# Altium PCB Sensor.PcbDoc
Units mil, origin at the board's own origin, x right, y up, seen from the top; angles counter-clockwise.
Board outline 3145 x 2060 mil, 2 copper layers (Top Layer, Bottom Layer); 73 components, 75 nets, 233 pads, 48 vias.
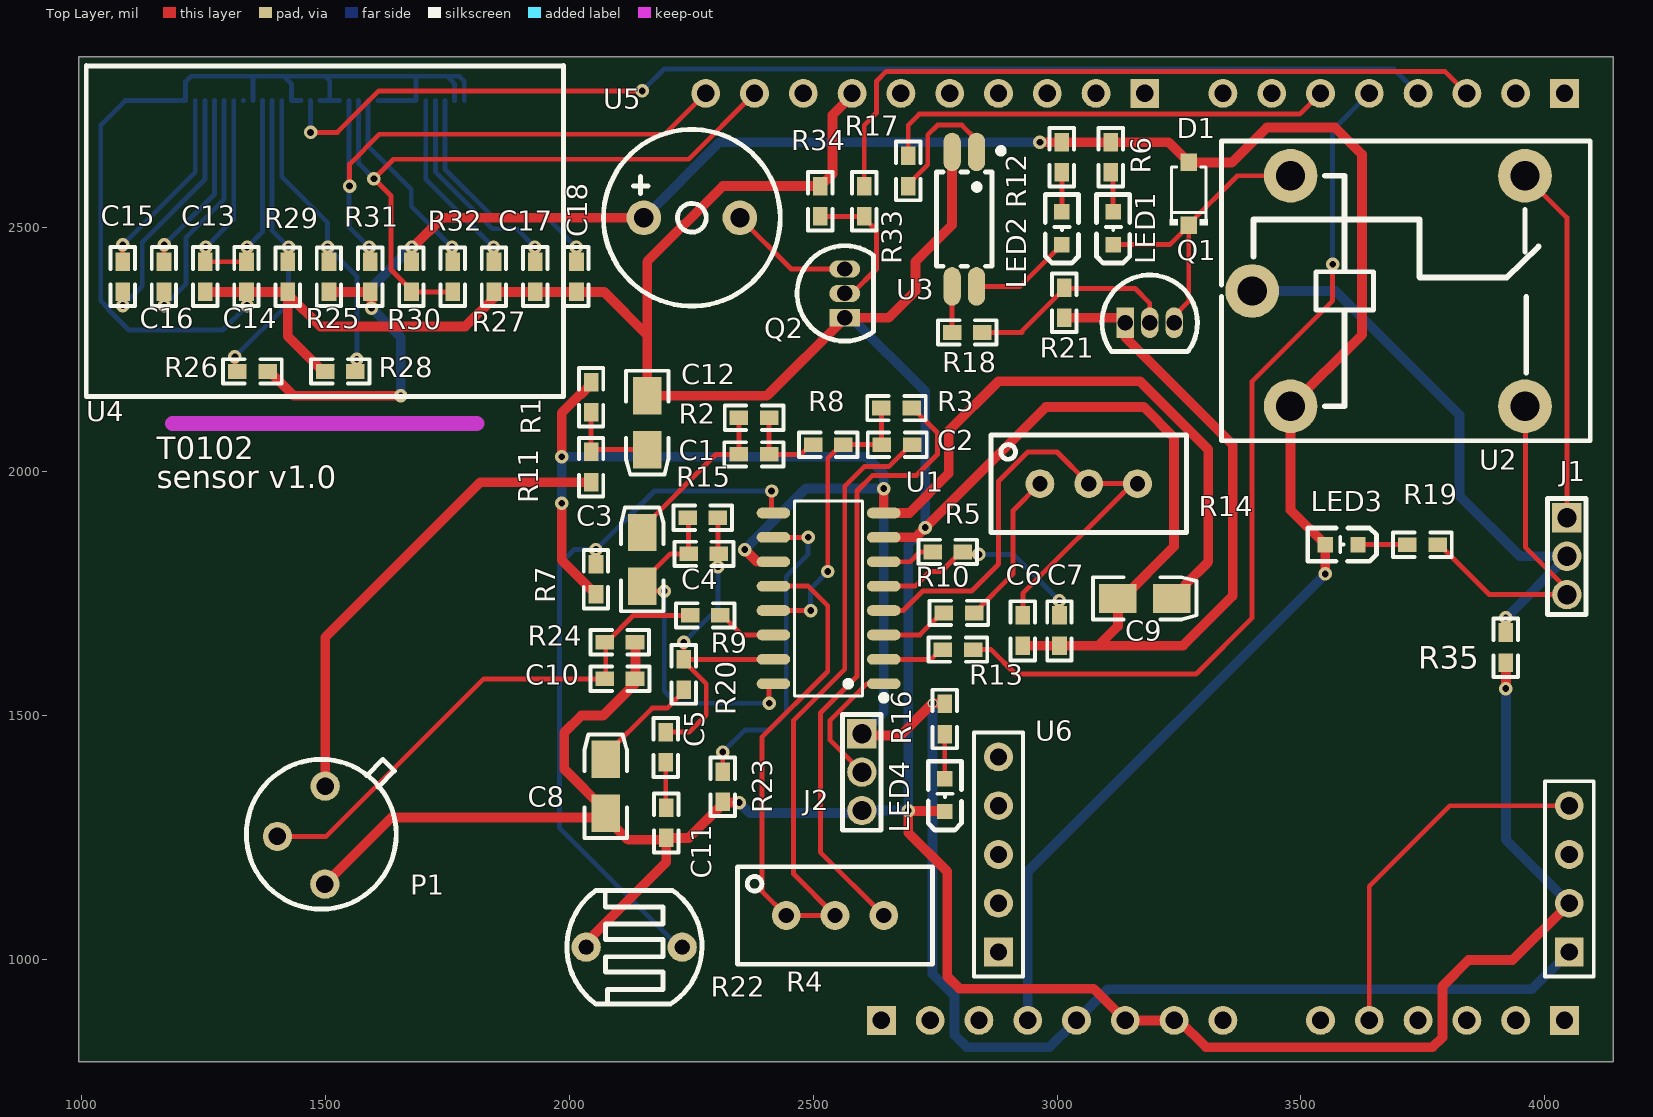
[diagram p0: Top Layer view]
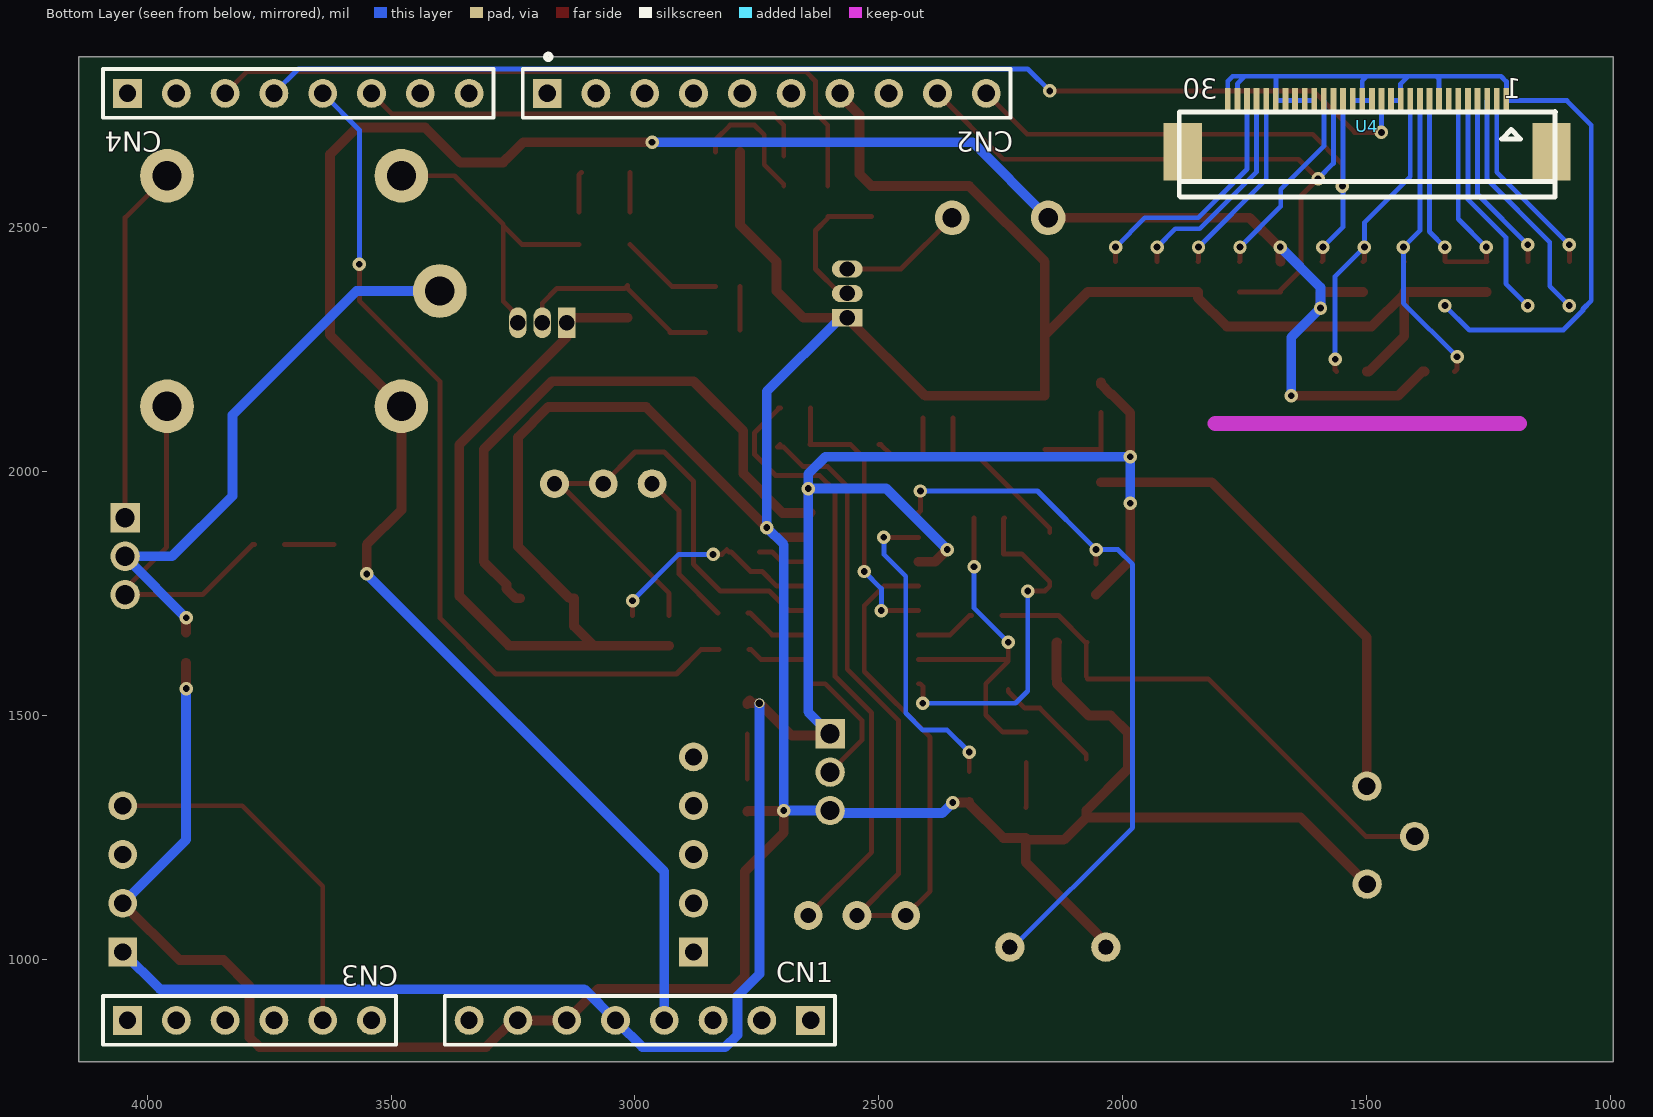
[diagram p1: Bottom Layer view, seen from below]
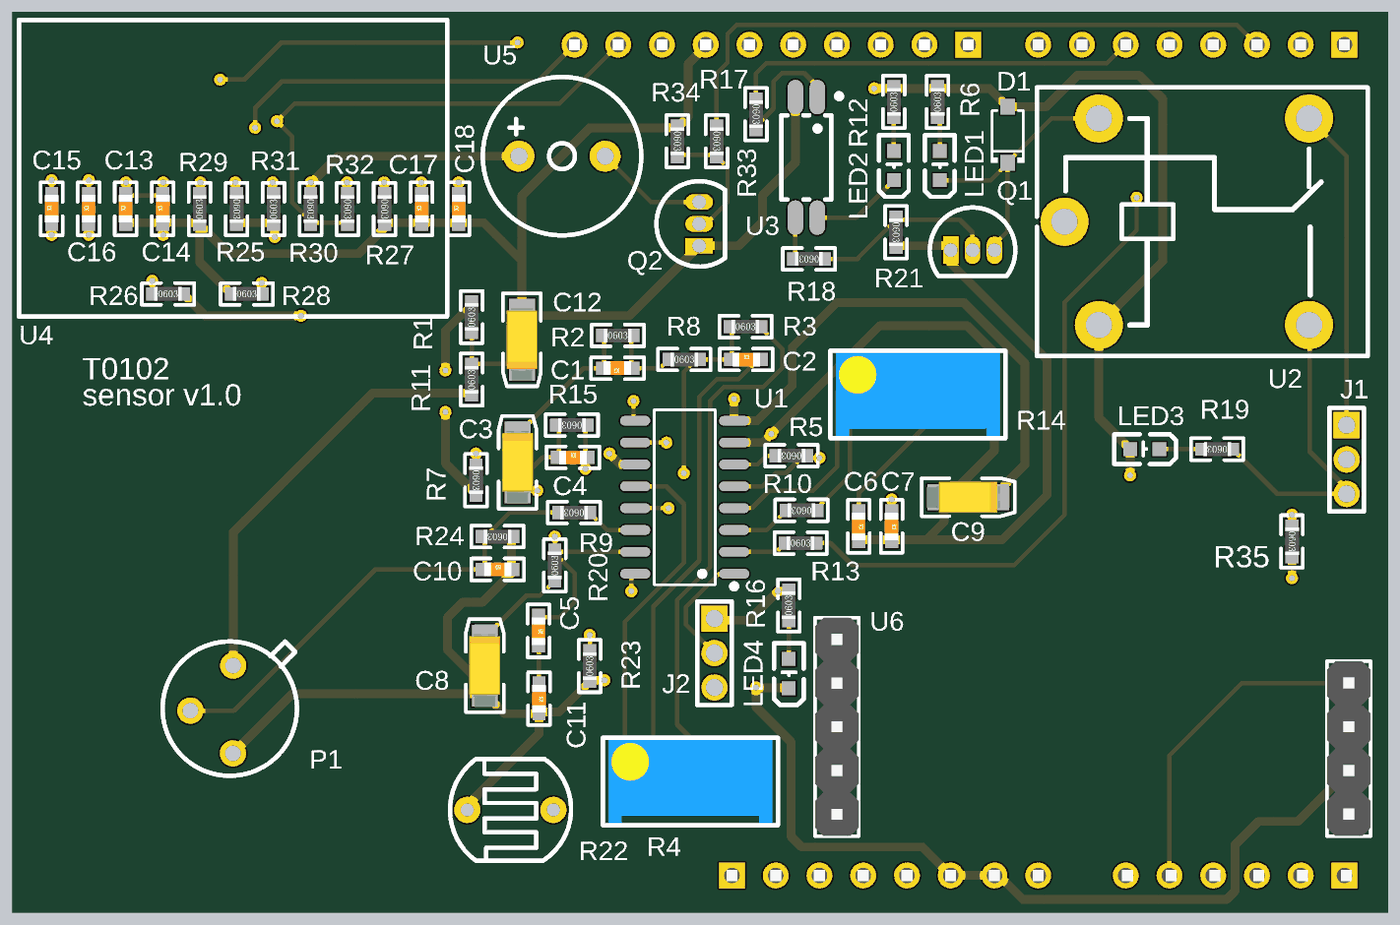
[diagram p2: 3D render of the assembled board from above, using the file's embedded part models]
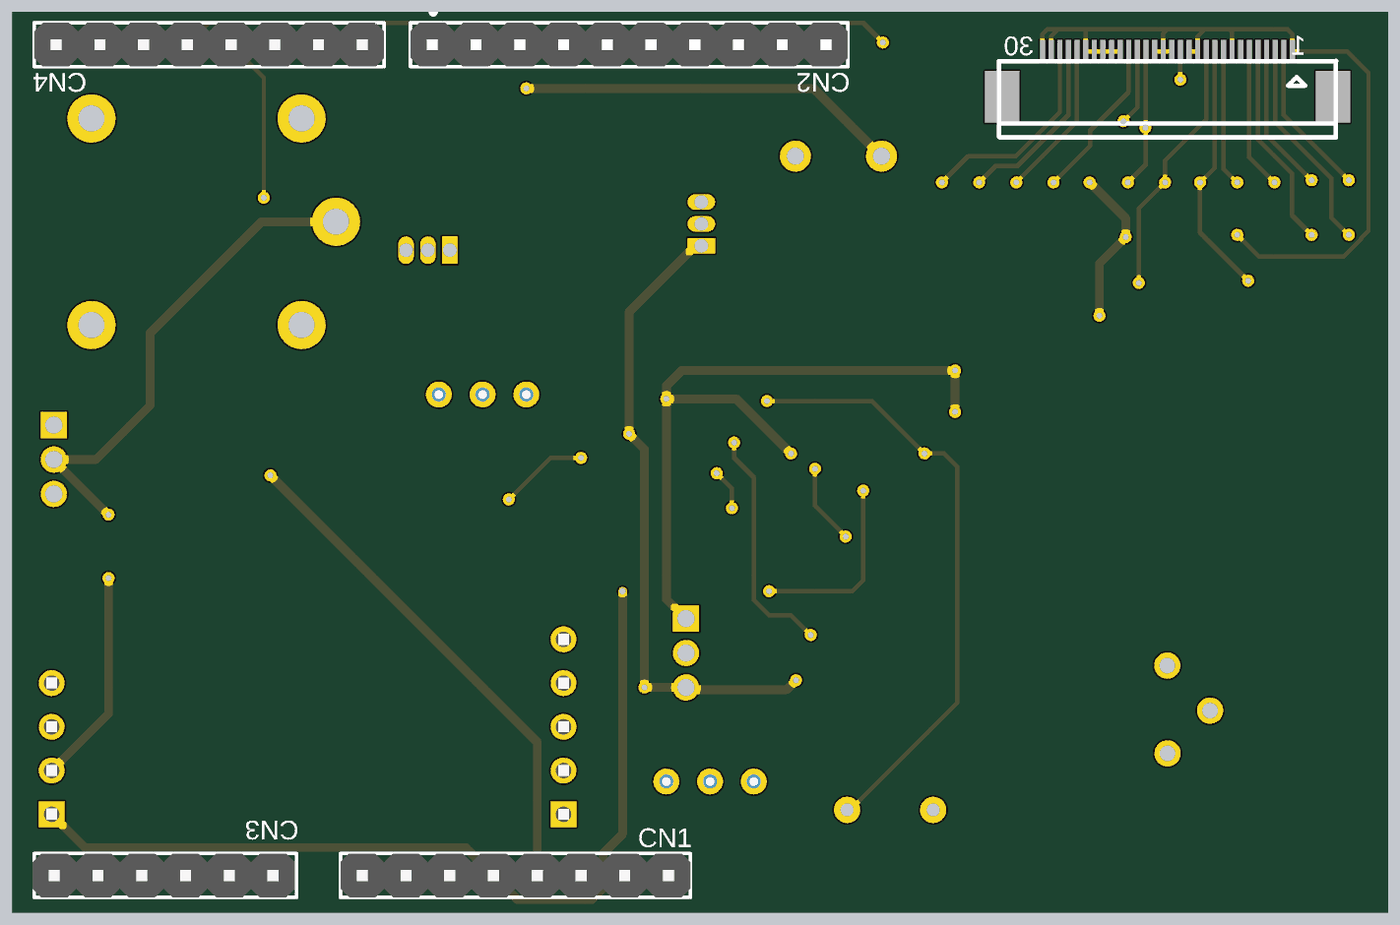
[diagram p3: 3D render of the assembled board from below, using the file's embedded part models]

## Layer stack, top to bottom
Top Solder: solder mask 0.4, Solder Resist, Dk 3.5
Top Layer: signal copper 1.4
Dielectric 1: dielectric 12.6, FR-4, Dk 4.8
Bottom Layer: signal copper 1.4
Bottom Solder: solder mask 0.4, Solder Resist, Dk 3.5

## Board outline
995,995 995,2850 4140,2850 4140,790 995,790

## Design rules (kind name [scope] priority, off if disabled: settings)
Clearance [All] p1: gap=6 ignorepadtopadclearanceinfootprint=FALSE
MinimumSolderMaskSliver [All] p1: minsoldermaskwidth=5
PolygonConnect [All] p1: connectstyle=Relief reliefconductorwidth=10 reliefentries=4 polygonreliefangle="90 Angle" airgapwidth=10
RoutingVias [All] p1: holewidth=28 width=50 viastyle="Through Hole" minholewidth=28 minwidth=50 maxholewidth=28 maxwidth=50
SilkToSilkClearance [All] p1: silktosilkclearance=6
SilkToSolderMaskClearance [IsPad] p1: minsilkscreentomaskgap=0 clearancetoexposedcopper=TRUE
SolderMaskExpansion [All] p1: expansion=4
Width width_Power [InNetClass('All Nets')] p1: maxlimit=30 minlimit=10 preferedwidth=20
Width [All] p2: maxlimit=30 minlimit=8 preferedwidth=10
27 further rules are at their usual default settings.

## Components (designator, comment, footprint, x,y, rotation, side; value= is the part's Value field where it differs from the comment)
C1 "0.1uF" "0603 - CAP" 2410,2035 r180 top value="100nF(104) ±10% 10V"
C2 "0.01uF" "0603 - CAP" 2641,2055 r0 top value="10nF(103) ±10% 10V"
C3 "22uF" C-钽贴A(S)_3216M_18(12) 2150,1819.88 r270 top value="22uF(226) ±20% 6.3V"
C4 "0.01uF" "0603 - CAP" 2245,1831.1 r0 top value="10nF(103) ±10% 10V"
C5 "5.0nF" "0603 - CAP" 2198,1465.9 r270 top value="5.0nF(502) ±10% 50V"
C6 "0.01uF" "0603 - CAP" 2930,1705 r270 top value="10nF(103) ±10% 10V"
C7 "0.1uF" "0603 - CAP" 3005,1705 r270 top value="100nF(104) ±10% 10V"
C8 "47uF" C-钽贴A(S)_3216M_18(12) 2075,1355 r270 top value="47uF(476) ±10% 6.3V"
C9 "22uF" C-钽贴A(S)_3216M_18(12) 3180,1740 r180 top value="22uF(226) ±20% 6.3V"
C10 "0.01uF" "0603 - CAP" 2073,1575 r0 top value="10nF(103) ±10% 10V"
C11 "0.01uF" "0603 - CAP" 2199,1311 r270 top value="10nF(103) ±10% 10V"
C12 "47uF" C-钽贴A(S)_3216M_18(12) 2160,2100.12 r90 top value="47uF(476) ±10% 6.3V"
C13 "1uF" "0603 - CAP" 1254.09,2368 r90 top value="1uF(105) ±10% 6.3V"
C14 "1uF" "0603 - CAP" 1338.64,2368 r90 top value="1uF(105) ±10% 6.3V"
C15 "1uF" "0603 - CAP" 1085,2368 r90 top value="1uF(105) ±10% 6.3V"
C16 "1uF" "0603 - CAP" 1169.55,2368 r90 top value="1uF(105) ±10% 6.3V"
C17 "4.7uF" "0603 - CAP" 1930.45,2368 r90 top value="4.7uF ±10% 6.3V"
C18 "2.2uF" "0603 - CAP" 2015,2368 r90 top value="2.2uF ±20% 4V"
CN1 "Header 8X1" HDR1X8 2640,875 r0 bottom value="排针 8X1 2.5"
CN2 "Header 10X1" HDR1X10 3180,2775 r180 bottom locked value="排针 10X1 2.5"
CN3 "Header 6X1" HDR1X6 4040,875 r180 bottom value="排针 6X1 2.5"
CN4 "Header 8X1" HDR1X8 4040,2775 r180 bottom locked value="排针 8X1 2.5"
D1 "1N4148W" 1N4148W 3230.48,2510.09 r90 top
J1 "" "HDR1X3 - duplicate1" 3932.79,1736.18 r270 top locked
J2 "Header 3" "HDR1X3 - duplicate1" 2487.79,1293.66 r270 top
LED1 "LED" 0603-LED 3088,2424 r90 top
LED2 "LED" 0603-LED 2983,2424 r90 top
LED3 "LED" 0603-LED 3658,1823 r180 top
LED4 "LED" 0603-LED 2743,1262 r90 top
P1 "PIR" PIR 1334.22,1414.64 r270 top value=AS312
Q1 "S8050" TO-92_3 3084.2,2271.95 r0 top
Q2 "S8050" TO-92_3 2598.05,2259.2 r90 top
R1 "10K" "0603 - RES" 2045,2121 r90 top value="10K¦¸ ¡"
R2 "2K" "0603 - RES" 2348,2110 r0 top value="2KΩ(2K) ±1% 50"
R3 "470K" "0603 - RES" 2640,2130 r0 top value="470KΩ(470K) ±1% 50"
R4 "1M" 3296W 2545,1090 r270 top locked value="1MΩ ±10% ±250p"
R5 "1M" "0603 - RES" 2807,1835 r180 top value="1M¦¸ ¡"
R6 "1K" "0603 - RES" 3110,2613 r90 top value="1KΩ(1K) ±1% 50"
R7 "1M" "0603 - RES" 2055,1810 r270 top value="1M¦¸ ¡"
R8 "6.8K" "0603 - RES" 2500,2055 r0 top value="6.8K¦¸(6801) ¡"
R9 "18K" "0603 - RES" 2310,1705 r180 top value="18K¦¸(1802) ¡"
R10 "10K" "0603 - RES" 2830,1710 r180 top value="10K¦¸ ¡"
R11 "18K" "0603 - RES" 2045,1978 r90 top value="18K¦¸(1802) ¡"
R12 "1K" "0603 - RES" 3010,2613 r90 top value="1KΩ(1K) ±1% 50"
R13 "1K" "0603 - RES" 2766,1635 r0 top value="1KΩ(1K) ±1% 50"
R14 "1M" 3296W 3065,1975 r270 top value="1MΩ ±10% ±250p"
R15 "1M" "0603 - RES" 2305,1905 r180 top value="1M¦¸ ¡"
R16 "10K" "0603 - RES" 2770,1461.7 r90 top value="10K¦¸ ¡"
R17 "1K" "0603 - RES" 2695,2647 r270 top value="1KΩ(1K) ±1% 50"
R18 "2.2K" "0603 - RES" 2847,2285 r180 top value="2.2K¦¸(2201) ¡"
R19 "1K" "0603 - RES" 3780,1850 r180 top value="1KΩ(1K) ±1% 50"
R20 "18K" "0603 - RES" 2235,1553 r90 top value="18K¦¸(1802) ¡"
R21 "10K" "0603 - RES" 3015,2377 r270 top value="10K¦¸ ¡"
R22 "CDS" RES-guangmin 2253.2,1153.14 r270 top value=光敏
R23 "1M" "0603 - RES" 2315,1323 r90 top value="1M¦¸ ¡"
R24 "47K" "0603 - RES" 2135,1650 r180 top value="10K¦¸ ¡"
R25 "1K" "0603 - RES" 1507.73,2430 r270 top value="1KΩ(1K) ±1% 50"
R26 "1K" "0603 - RES" 1320,2205 r0 top value="1KΩ(1K) ±1% 50"
R27 "1M" "0603 - RES" 1845.91,2430 r270 top value="1M¦¸ ¡"
R28 "1K" "0603 - RES" 1500,2205 r0 top value="1KΩ(1K) ±1% 50"
R29 "1K" "0603 - RES" 1423.18,2368 r90 top value="1KΩ(1K) ±1% 50"
R30 "4.7K" "0603 - RES" 1676.82,2430 r270 top value="4.7KΩ(472) ±"
R31 "4.7K" "0603 - RES" 1592.27,2368 r90 top value="4.7KΩ(472) ±"
R32 "0" "0603 - RES" 1761.36,2430 r270 top value="0¦¸(0000) ¡"
R33 "1K" "0603 - RES" 2605,2585 r270 top value="1KΩ(1K) ±1% 50"
R34 "10K" "0603 - RES" 2515,2585 r270 top value="10K¦¸ ¡"
R35 "4R7" "0603 - RES" 3920,1670 r270 top value="4.7Ω(4R7) ±"
U1 "BISS001" SOP-16_150mil 2372.35,1574.26 r90 top locked value=BISS0001
U2 "SRD-03VDC_SL_C" SRD-03VDC-SL-C 3331.86,2057.73 r0 top value="SRD-03VDC-SL-C 蓝?"
U3 "TLP291(GB-TP,SE" TLP291(GB-TP,SE 2736.91,2352.04 r90 top
U4 "OLED 0.96" "oled 0.96" 1011.75,2828.25 r0 top locked value="oled 0.96 30pin"
U5 "Bell" BUZZER_mini 1991.29,2663.72 r0 top value=µç´ÅÊ
U6 "SenseAir S8" "SenseAir S8" 3902,995 r180 top locked value="Sweden SenseAir imported CO2 sensor S8-0053, 0-2000PPM"

## Footprints (in the part's own frame and the unit in brackets; to place one, negate y for a bottom-side part, rotate by r counter-clockwise, add the part's x,y. Pads: shape width x height; smd on the part's side, far side on the other; paste and mask are expansions set on the pad)
1N4148W [mm]
  rect 0.91x0.84 smd: 1(-0.129,-1.004) 2(3.131,-1.004)
  silkscreen extent -0.13,-1.98 2.9,-0.03
"0603 - CAP" [mil]
  rect 38x30 smd: 1(0,0) 2(62,0)
  silkscreen extent -29,-25 92,25, body extent 1,-16 63,15, height 12
"0603 - RES" [mil]
  rect 38x30 smd: 1(0,0) 2(62,0)
  silkscreen extent -29,-25 91,25, body extent 0,-16 62,16, height 18
0603-LED [mil]
  rect 31.5x31.5 smd: 1(108,-27) 2(41,-27)
  silkscreen extent 3,-61 144,7
3296W [mm]
  round 1.5 hole 0.8: 1(0,-2.54) 2(0,0) 3(0,2.54)
  silkscreen extent -2.54,-5.08 2.54,5.08, body extent -2.41,-4.76 2.42,4.76, height 11.55
BUZZER_mini [mm]
  round 1.8 hole 1: 1(4.111,-3.65) 2(9.111,-3.65)
  silkscreen extent 2.01,-8.25 11.21,0.95
C-钽贴A(S)_3216M_18(12) [mm]
  rect 1.95x1.5 smd: 1(-1.4,0) 2(1.4,0)
  silkscreen extent -2.7,-1.1 2.7,1.1, body extent -2.4,-0.9 2.4,0.9, height 1.8
"HDR1X3 - duplicate1" [mil] "2mm 3 pin 排针"
  rect 60x60 hole 39.37: 1(-168.82,112.21)
  round 60 hole 39.37: 2(-90.08,112.21) 3(-11.34,112.21)
  Top Layer region: 3,4 3,4 3,4 3,4
  Top Layer region: 3,4 3,4 3,4 3,4
  Top Layer region: 3,4 3,4 3,4 3,4
  silkscreen extent -208,73 29,152
HDR1X6 [mm] "Connector; Header; 6 Position"
  rect 1.5x1.5 hole 0.9: 1(0,0)
  round 1.5 hole 0.9: 2(2.54,0) 3(5.08,0) 4(7.62,0) 5(10.16,0) 6(12.7,0)
  silkscreen extent -1.27,-1.27 13.97,1.27, body extent -1.37,-1.27 13.87,1.27, height 8.54
HDR1X8 [mm] "Connector; Header; 8 Position"
  rect 1.5x1.5 hole 0.9: 1(0,0)
  round 1.5 hole 0.9: 2(2.54,0) 3(5.08,0) 4(7.62,0) 5(10.16,0) 6(12.7,0) 7(15.24,0) 8(17.78,0)
  silkscreen extent -1.27,-1.27 19.05,1.27, body extent -1.27,-1.27 19.05,1.27, height 8.54
HDR1X10 [mm] "Connector; Header; 10 Position"
  rect 1.5x1.5 hole 0.9: 1(0,0)
  round 1.5 hole 0.9: 2(2.54,0) 3(5.08,0) 4(7.62,0) 5(10.16,0) 6(12.7,0) 7(15.24,0) 8(17.78,0) 9(20.32,0) 10(22.86,0)
  silkscreen extent -1.27,-1.27 24.13,2.04, body extent -1.27,-1.27 24.13,1.27, height 8.54
"oled 0.96" [mm]
  rect 0.3x1.3 smd far side: 1(5.139,-1.733) 2(5.638,-1.733) 3(6.139,-1.733) 4(6.639,-1.733) 5(7.14,-1.733) 6(7.64,-1.733) 7(8.14,-1.733) 8(8.64,-1.734) 9(9.139,-1.734) 10(9.639,-1.734) 11(10.14,-1.734) 12(10.64,-1.734) 13(11.14,-1.734) 14(11.64,-1.734) 15(12.14,-1.734) 16(12.64,-1.734) 17(13.14,-1.734) 18(13.64,-1.734) 19(14.14,-1.734) 20(14.64,-1.734) 21(15.14,-1.734) 22(15.64,-1.734) 23(16.14,-1.734) 24(16.64,-1.734) 25(17.14,-1.734) 26(17.64,-1.734) 27(18.14,-1.734) 28(18.64,-1.734) 29(19.14,-1.734) 30(19.64,-1.734)
  rect 2x3 smd far side: 31(2.789,-4.384) 32(21.99,-4.384)
  Keep-Out Layer lines w0.8: 4.451,-18.538 20.284,-18.538
  silkscreen extent -0.03,-17.15 24.82,0.09
PIR [mil] "人体热释电传感器 3pin"
  round 60 hole 36: 1(59.64,165.78) 2(162.64,67.88) 3(260.44,165.18)
  silkscreen extent 5,4 312,311
RES-guangmin [mil] "光敏电阻"
  round 60 hole 30 slot 30.2 at 90 deg: 1(128.14,-218.2) 2(128.14,-21.35)
  silkscreen extent 12,-258 244,19
"SenseAir S8" [mm]
  rect 1.5x1.5 hole 0.9: 1(-3.759,-0.508) 9(25.959,-0.508)
  round 1.5 hole 0.9: 2(-3.759,-3.048) 3(-3.759,-5.588) 4(-3.759,-8.128) 5(25.959,-10.668) 6(25.959,-8.128) 7(25.959,-5.588) 8(25.959,-3.048)
  silkscreen extent -5.03,-11.94 27.23,0.76, body extent -5.03,-11.94 27.23,0.76, height 8.54
SOP-16_150mil [mm]
  oval 0.56x1.745 smd: 1(-0.235,-6.925) 2(1.035,-6.925) 3(2.305,-6.925) 4(3.575,-6.925) 5(4.845,-6.925) 6(6.115,-6.925) 7(7.385,-6.925) 8(8.655,-6.925) 9(8.655,-1.18) 10(7.385,-1.18) 11(6.115,-1.18) 12(4.845,-1.18) 13(3.575,-1.18) 14(2.305,-1.18) 15(1.035,-1.18) 16(-0.235,-1.18)
  silkscreen extent -1.12,-7.08 9.29,-2.28
SRD-03VDC-SL-C [mil] "蓝色 3V 继电器"
  round 110 hole 60: 1(146.88,76.05) 2(627.19,76.07) 3(627.2,548.47) 4(146.88,548.49) 5(68.14,312.27)
  silkscreen extent 5,5 761,619
TLP291(GB-TP,SE [mm] "光耦"
  oval 2x0.9 smd: 1(7.695,-2.492) 2(7.695,-1.222) 3(0.695,-1.222) 4(0.695,-2.492)
  silkscreen extent 1.75,-3.91 7.9,-0.41
TO-92_3 [mm] "s8050"
  rect 0.9x1.6 hole 0.8: 1(1.417,0.839)
  oval 0.9x1.6 hole 0.8: 2(2.687,0.839) 3(3.957,0.839)
  silkscreen extent 0.2,-0.66 5.17,3.32

## Part data
C1 C2 C4 C6 C7 C10 C11 C13 C14 C15 C16: library part Capacity_normal, Manufactor=YAGEO(国?, Package=0603
C3 C9: library part Capacity_electric, Manufactor=SAMSUNG(三?, Package=0603
C5: library part Capacity_normal, Manufactor=FH(风?, Package=0603
C8 C12: library part Capacity_electric, Manufactor=CEC(Õñ», Package=CASE-A_3216
C17: library part Capacity_normal, Manufactor=muRata(村?, Package=0603
C18: library part Capacity_normal, Manufactor=AVX, Package=0603
D1: Manufactor=YANGJIE(扬?, Package=SOD-123
J1: library part "Header 3", "Header,3-pin", Package="2mm 1X3排?"
J2: "Header,3-pin", Package="2mm 1X3排?"
LED1 LED2 LED3 LED4: Manufactor=Ì¨Í, Package=0603
P1: Manufactor=ɭ?, Package="Through Hole"
Q1 Q2: Manufactor=LGE(³?, Package=TO-92
R1 R5 R7 R10 R15 R16 R21 R23 R24 R27 R34: library part RES, Manufactor=UNI-ROYAL(厚?, Package=0603
R2 R3 R6 R8 R9 R11 R12 R13 R17 R18 R19 R20 R25 R26 R28 R29 R32 R33: library part RES, Manufactor=YAGEO(国?, Package=0603
R4 R14: library part 可调电阻, Manufactor=BOCHEN(²©³, Package=3296W
R22: library part 光敏电阻, Manufactor=JCHL(晶创, Package="Through Hole"
R30 R31: library part RES, Manufactor=YAGEO(¹ú¾, Package=0603
R35: library part RES, Manufactor=ROHM(ÂÞÄ, Package=0603
U1: "热释电传感器", Manufactor=ÎÞÎ, Package=SOP-16_150mil
U2: "SL，3V 继电器模块", Manufactor=松?, Package="Through Hole"
U3: Manufactor=TOSHIBA(东?, Package=SOP-4_P1.27
U4: "中景园 0.96寸OLED 30pin", Manufactor=中?, Package=0.96
U5: Manufactor=Fengming(·æÃ, Package="Through Hole,9x5.5mm"
U6: Manufactor=瑞士Sense

## Via types
v1: diameter 27.56, hole 13.78, Top Layer to Bottom Layer, 47 vias
v2: diameter 20, hole 15, Top Layer to Bottom Layer, 1 vias

## Nets (pads, with @x,y where several pads share a name; then routed paths per layer and width w, separated by ;. In a path a pad name is that pad's centre, name@x,y a point inside that pad or via, vN(x,y) a via of type N, cw(c..) or ccw(c..) an arc to the next point about the centre after c; other vN are vias at no path point)
BS0: R26.1 R29.2 U4.10 | length 647.4
  Top Layer w10: v1(1315,2235) 1315,2210 R26.1 ; R29.2 1425,2431.82 v1(1425,2460)
  Bottom Layer w10: v1(1315,2235) 1425,2345 v1(1425,2460) 1391.24,2493.76 U4.10
BS1: R25.1 R28.2 U4.11 | length 651.2
  Top Layer w10: v1(1505,2460) 1505,2432.73 R25.1 ; R28.2 1565,2208 v1(1565,2230)
  Bottom Layer w10: U4.11 1410.94,2604.06 1505,2510 v1(1505,2460) 1565,2400 v1(1565,2230)
COM: J1.2 R35.1 U2.5 | length 1168.7
  Top Layer w20: R35.1 v1(3920,1700)
  Bottom Layer w20: U2.5 3570.63,2370 3825,2115.63 3825,1950 3948.74,1826.26 J1.2 ; v1(3920,1700) J1.2@4041.26,1821.26
EVIN5V: CN1.8
EXT_ADC0: CN3.6
EXT_ADC1: CN3.5 U6.4 | length 753.3
  Top Layer w10: CN3.5 3640,1150 3805,1315 U6.4
EXT_ADC2: CN3.4
EXT_ADC3: CN3.3
EXT_ADC4: CN3.2
EXT_ADC5: CN3.1
EXT_AIN0: CN4.8
EXT_AIN1: CN4.7
EXT_AREF: CN2.8
EXT_GPIO_1: CN4.6 R17.1 | length 934.9
  Top Layer w10: R17.1 2695,2710 2717.47,2732.47 3497.47,2732.47 CN4.6
EXT_GPIO_2: CN4.5 R13.2 | length 1814.8
  Top Layer w10: R13.2 2865,1635 2915,1585 3285,1585 3400,1700 3400,2185 3565,2350 v1(3565,2425)
  Bottom Layer w10: v1(3565,2425) 3565,2700 CN4.5
EXT_GPIO_3: CN4.4 U4.14 | length 2409.6
  Top Layer w10: v1(1470,2695) 1525,2695 1610,2780 v1(2150,2780)
  Bottom Layer w10: v1(1470,2695) U4.14 ; v1(2150,2780) 2195,2825 3690,2825 CN4.4
EXT_GPIO_4: CN4.3 R33.1 | length 1462.3
  Top Layer w10: R33.1 2605,2710 2630,2735 2630,2800 2650,2820 3795,2820 CN4.3
EXT_I2C2_SCL: CN2.10 R31.2 U4.18 | length 1183.1
  Top Layer w10: v1(1550,2585) 1550,2630 1611.26,2691.26 2196.26,2691.26 CN2.10 ; v1(1590,2460) 1590,2432.27 R31.2
  Bottom Layer w10: U4.18 1548.75,2501.25 v1(1590,2460)
EXT_I2C2_SDA: CN2.9 R30.2 R32.2 U4.19 | length 1373.9
  Top Layer w10: R32.2 R30.2 1676.82,2372 1635,2413.82 1635,2565 v1(1600,2600) 1640,2640 2245,2640 CN2.9
  Bottom Layer w10: U4.19 1568.43,2631.57 v1(1600,2600)
EXT_SPI1_MISO: CN2.5
EXT_SPI1_MOSI: CN2.4
EXT_SPI1_NSS: CN2.3
EXT_SPI1_SCK: CN2.6
EXT_TIM4_CH2: CN2.2
EXT_TIM4_CH3: CN2.1
EXT_USART6_RX: CN4.1
EXT_USART6_TX: CN4.2
GND: C6.2 C7.2 C8.2 C9.2 C10.2 C11.2 C12.2 C13.1 C14.1 C17.1 C18.1 CN1.6 CN1.7 CN2.7 J2.3 LED4.2 P1.3 Q1.1 Q2.1 R21.2 R22.1 R23.1 R24.1 R27.2 R28.1 R29.1 R34.1 R35.2 U1.7 U3.2 U4.1 U4.8 U4.12 U4.13 U4.15 U4.16 U4.17 U4.21 U4.22 U4.23 U4.24 U4.25 U4.29 U4.30 U6.2 | length 13215.5
  Top Layer w20: C13.1 C14.1 R29.1 R29.1@1423.18,2364 ; P1.3 1636.22,1291.02 C8.2@2075,1291.02 ; R28.1 1496,2205 1423.18,2277.82 R29.1@1423.18,2364 ; R22.1@2048.15,1030 2048.15,1048.15 2199,1199 C11.2 ; C10.2 2135,1565 2070,1500 2025,1500 1990,1465 1990,1390.47 2075,1305.47 C8.2 C8.2@2075,1291.02 ; R24.1 2136,1649 C10.2@2136,1575 ; v1(2348.55,1321.45) 2316.55,1321.45 R23.1 2315,1319 2245,1249 C11.2 ; CN2.7 2580,2770.82 2540,2730.82 2540,2610 R34.1 2315,2585 2160,2430 2160,2280 ; U1.7 2710,1865 v1(2730,1885) 2977,2132 3178,2132 3240,2070 3240,1846.26 3133.74,1740 C9.2 3124.88,1682.88 3085,1643 ; v1@2693.55,1306.45 v1(2695,1305) ; LED4.2 2769,1304 2696,1304 v1(2695,1305) ; U3.2 2785,2505 2710,2430 2710,2370 2655,2315 Q2.1 2405.24,2155.24 C12.2 2160,2280 ; C6.2 C7.2 3085,1643 ; R21.2 3132.28,2315 Q1.1@3140,2307.28 ; Q1.1 3140,2275 3360,2055 3360,1745 3258,1643 3085,1643 ; v1(3920,1555) R35.2 ; U6.2 3933.63,998.63 3843.63,998.63 3790,945 3790,840 3770,820 3305,820 3250,875 CN1.7 CN1.6 3075,940 2800,940 2775,965 2775,1180 2695,1260 v1(2695,1305) ; R29.1@1423.18,2364 1490.18,2297 1787,2297 1845.91,2355.91 R27.2 C17.1 C18.1 2072,2368 2160,2280 ; C8.2@2075,1291.02 2121.02,1245 2195,1245 C11.2
  Bottom Layer w10: v1(1340,2340) 1290,2290 1097.13,2290 1056.95,2330.17 1056.95,2333.05 1040,2350 1040,2710 1090.01,2760.01 U4.1 1214.08,2799.08 1225,2810 1357.5,2810 ; U4.8 1351.89,2804.39 1357.5,2810 ; U4.13 U4.12 1430.64,2794.36 1415,2810 ; U4.15 U4.16 ; U4.17 U4.16 ; U4.21 U4.22 U4.23 U4.24 U4.25 1686.54,2806.54 1690,2810 ; U4.29 1765.28,2794.72 1750,2810 ; U4.30 1785,2800 1775,2810 1750,2810 ; 1357.5,2810 1415,2810 ; 1415,2810 1500,2810 ; 1500,2810 1690,2810 ; 1500,2810 1509.37,2800.63 U4.16 ; 1690,2810 1750,2810
  Bottom Layer w20: v1(2348.55,1321.45) 2370,1300 2595,1300 J2.3 v1(2695,1305) 2695,1850 v1(2730,1885) 2730,2163.78 2578.78,2315 Q2.1 ; v1(3920,1555) 3920,1245 U6.2
NC: J1.1 U2.3 | length 736.8
  Top Layer w10: U2.3 4045,2520.26 J1.1
NetC1_1: C1.1 R2.2 R8.1 | length 173.3
  Top Layer w10: R2.2 C1.1 2476,2035 2496,2055 R8.1
NetC1_2: C1.2 C3.1 R2.1 | length 344.5
  Top Layer w10: C3.1 2150,1883.86 2301.14,2035 C1.2 R2.1
NetC2_1: C2.1 R3.1 R8.2 U1.13 | length 600.7
  Top Layer w10: U1.13 v1(2495,1715) ; v1(2530,1795) 2530,2027 2558,2055 R8.2 C2.1 2640,2056 R3.1
  Bottom Layer w10: v1(2495,1715) 2495,1760 v1(2530,1795)
NetC2_2: C2.2 R4.1 R4.2 U1.12 | length 2081.3
  Top Layer w10: U1.12 2490,1765 2530,1725 2530,1590 2395,1455 2395,1140 R4.1 R4.2 2460,1175 2460,1490 2565,1595 2565,1970 2605,2010 2655,2010 2695,2050 2708,2050 C2.2
NetC3_2: C3.2 C4.1 R15.2 U1.16 | length 727.4
  Top Layer w10: v1(2195,1755) 2159.76,1755 C3.2 2150,1773.62 2207.47,1831.1 C4.1 2245,1903 R15.2 ; v1(2410,1525) 2410,1559.44 2415.56,1565 U1.16
  Bottom Layer w10: v1(2195,1755) 2195,1550 2220,1525 v1(2410,1525)
NetC4_2: C4.2 C5.1 R15.1 R20.2 U1.15 | length 733.4
  Top Layer w10: C5.1 2245.9,1465.9 2281,1501 2281,1565 2235,1611 R20.2 ; v1(2235,1650) R20.2 ; v1(2305,1805) R15.1 ; U1.15 R20.2
  Bottom Layer w10: v1(2235,1650) 2305,1720 v1(2305,1805)
NetC5_2: C5.2 C11.1 | length 93.3
  Top Layer w10: C5.2 2198,1312 C11.1
NetC6_1: C6.1 R14.2 R14.3 U1.4 | length 1144.2
  Top Layer w10: U1.4 2685,1715 2725,1755 2825,1755 2880,1810 2880,1980 2940,2040 3000,2040 R14.2 R14.3@3154.75,1975 ; C6.1 2930,1750.25 R14.3@3154.75,1975 ; R14.3 R14.3@3154.75,1975
NetC7_1: C7.1 R5.1 U1.5 | length 464.6
  Top Layer w10: U1.5 2709.54,1765 2739.54,1795 2763,1795 2803,1835 R5.1 2812,1840 2822,1830 v1(2840,1830) ; C7.1 v1(3005,1735)
  Bottom Layer w10: v1(2840,1830) 2910,1830 v1(3005,1735)
NetC8_1: C8.1 R20.1 | length 227.3
  Top Layer w10: C8.1 2075,1420 2170,1515 2201,1515 2235,1549 R20.1
NetC10_1: C10.1 P1.2 R9.2 R24.2 | length 1073.3
  Top Layer w10: P1.2 1502,1252 1825,1575 C10.1 ; C10.1@2075,1580 2075,1648 R24.2 2077,1650 2132,1705 R9.2
NetC12_1: C12.1 R1.1 R11.2 | length 198.1
  Top Layer w10: R1.1 R11.2 2050,2045 C12.1
NetC13_2: C13.2 C14.2 U4.6 U4.9 | length 782.4
  Top Layer w10: v1(1255,2460) 1255,2430.91 C13.2 C14.2 1340,2431.36 v1(1340,2460)
  Bottom Layer w10: v1(1255,2460) 1312.53,2517.53 U4.6 ; v1(1340,2460) 1371.54,2491.54 U4.9
NetC15_1: C15.1 U4.3 | length 489.8
  Bottom Layer w10: v1(1085,2340) 1125,2380 1125,2470 1253.43,2598.43 U4.3
NetC15_2: C15.2 U4.2 | length 391.6
  Top Layer w10: C15.2 v1(1085,2465)
  Bottom Layer w10: v1(1085,2465) 1233.73,2613.73 U4.2
NetC16_1: C16.1 U4.5 | length 470.9
  Bottom Layer w10: v1(1170,2340) 1215,2385 1215,2480 1292.83,2557.83 U4.5
NetC16_2: C16.2 U4.4 | length 372.9
  Top Layer w10: C16.2 1170,2430.45 v1(1170,2465)
  Bottom Layer w10: v1(1170,2465) 1273.13,2568.13 U4.4
NetC17_2: C17.2 U4.27 | length 444
  Top Layer w10: v1(1930,2460) 1930,2430.45 C17.2
  Bottom Layer w10: U4.27 1725.91,2614.09 1842.5,2497.5 1892.5,2497.5 v1(1930,2460)
NetC18_2: C18.2 U4.28 | length 505.8
  Top Layer w10: C18.2 v1(2015,2460)
  Bottom Layer w10: U4.28 1745.6,2619.86 1845.46,2520 1955,2520 v1(2015,2460)
NetD1_1: D1.1 LED1.2 Q1.3 U2.4 | length 634.9
  Top Layer w10: LED1.2 3231.38,2465 D1.1@3270,2503.62 ; Q1.3 3240,2318.78 3270,2348.78 D1.1@3270,2503.62 ; U2.4 3369.84,2606.22 3270,2506.38 D1.1 D1.1@3270,2503.62
NetJ2_2: J2.2 U1.1 | length 274.1
  Top Layer w10: J2.2@2600.18,1383.92 2564.62,1419.48 2535,1449.1 2535,1490 2610,1565 U1.1
NetLED1_1: LED1.1 R6.1 | length 83.1
  Top Layer w10: R6.1 3115,2608 LED1.1
NetLED2_1: LED2.1 R12.1 | length 81
  Top Layer w10: LED2.1 R12.1
NetLED2_2: LED2.2 U3.4 | length 210.5
  Top Layer w10: U3.4 2924.41,2379.41 LED2.2
NetLED3_2: LED3.2 R19.2 | length 101
  Top Layer w10: LED3.2 R19.2
NetLED4_1: LED4.1 R16.1 | length 91.7
  Top Layer w10: LED4.1 R16.1
NetP1_1: P1.1 R11.1 | length 981.7
  Top Layer w20: P1.1 1500,1660 1818,1978 R11.1
NetQ1_2: Q1.2 R18.1 R21.1 | length 436.5
  Top Layer w10: R18.1@2855,2285 2925.54,2285 ; 2928.54,2285 2925.54,2285 ; Q1.2 3190,2345 3160,2375 3021,2375 3015,2381 R21.1 3015,2374.46 2925.54,2285
NetQ2_2: Q2.2 R33.2 R34.2 | length 294.1
  Top Layer w10: R34.2 R33.2 2605,2519 2630,2494 2630,2415 2580,2365 Q2.2
NetQ2_3: Q2.3 U5.2 | length 258.5
  Top Layer w10: U5.2 2455,2415 Q2.3
NetR3_2: R3.2 R4.3 | length 1271.1
  Top Layer w10: R4.3 2515,1220 2515,1505 2590,1580 2590,1960 2622,1992 2712,1992 2755,2035 2755,2079 R3.2@2704,2130 ; R3.2 R3.2@2704,2130 ; R3.2@2706,2130 R3.2@2704,2130
NetR5_2: R5.2 U1.6 | length 108.3
  Top Layer w10: U1.6 2699,1815 2719,1835 R5.2
NetR7_1: R7.1 R22.2 U1.9 | length 1476.7
  Top Layer w10: R7.1 v1(2055,1840) ; v1(2415,1960) 2415,1918.82 U1.9 U1.9@2420,1916.18
  Bottom Layer w10: R22.2@2228.43,1021.58 1980,1270 1980,1810 2010,1840 v1(2055,1840) 2175,1960 v1(2415,1960) ; R22.2@2235,1030 R22.2@2245,1030
NetR9_1: R9.1 U1.14 | length 125.4
  Top Layer w10: R9.1 2314,1705 2354,1665 U1.14
NetR10_1: R10.1 R14.1 | length 320.9
  Top Layer w10: R10.1 2910,1790 2910,1920 R14.1
NetR10_2: R10.2 U1.3 | length 141.6
  Top Layer w10: U1.3 2719,1665 2764,1710 R10.2
NetR13_1: R13.1 U1.2 | length 129.3
  Top Layer w10: U1.2 2742,1615 2762,1635 R13.1
NetR17_2: R17.2 U3.1 | length 267.3
  Top Layer w10: R17.2 2695,2589 2735,2629 2735,2690 2755,2710 2805,2710 2835,2680 U3.1
NetR18_2: R18.2 U3.3 | length 89.4
  Top Layer w10: R18.2@2785,2290 U3.3
NetR23_2: R23.2 U1.10 | length 653
  Top Layer w10: R23.2 v1(2315,1425) ; U1.10 v1(2490,1865)
  Bottom Layer w10: v1(2315,1425) 2360,1470 2410,1470 2445,1505 2445,1785 2490,1830 v1(2490,1865)
NetR27_1: R27.1 U4.26 | length 387.9
  Top Layer w10: v1(1845,2460) 1845,2430.91 R27.1
  Bottom Layer w10: U4.26 1706.23,2598.77 v1(1845,2460)
NetR32_1: R32.1 U4.20 | length 401.8
  Top Layer w10: v1(1760,2460) 1760,2431.36 R32.1
  Bottom Layer w10: U4.20 1588.12,2666.88 1676.54,2578.46 1676.54,2543.46 v1(1760,2460)
NO: J1.3 R19.1 U2.2 | length 729.3
  Top Layer w10: R19.1 3784,1850 3886.48,1747.52 J1.3 4045,1760 3960,1845 3960,2132.85 U2.2
REST: CN1.3
VCC3.3: CN1.4 D1.2 LED3.1 R6.2 R12.2 R25.2 R26.2 R30.1 R31.1 U2.1 U5.1 | length 5031.5
  Top Layer w20: R26.2 1386,2205 1436,2155 v1(1655,2155) ; R25.2 R31.1 1595,2365.27 v1(1595,2335) ; R30.1 1677.5,2430.68 v1(1677.5,2460) 1680,2460 1740,2520 U5.1 ; v1(2965,2675) R12.2 R6.2 3228.35,2675 3262.09,2641.26 3263.46,2641.26 3270,2634.72 D1.2 3358.35,2633.35 3430,2705 3570,2705 3625,2650 3625,2280.04 U2.1 3478.74,1921.26 LED3.1 v1(3550,1790)
  Bottom Layer w20: v1(1655,2155) 1655,2275 v1(1595,2335) 1595,2377.5 v1(1677.5,2460) ; U5.1 2308.15,2675 v1(2965,2675) ; CN1.4 2940,1180 v1(3550,1790)
VCC5V: C9.1 CN1.5 J2.1 R1.2 R7.2 R16.2 U1.8 U1.11 U6.1 | length 5657.1
  Top Layer w20: v1(1985,1935) 1985,1818 R7.2 ; v1(1985,2030) 1985,2120.46 2022.54,2158 2024,2158 2045,2179 R1.2 ; v1(2360,1840) 2385,1815 U1.11 ; J2.1@2600,1458.74 2678.74,1458.74 v2(2745,1525) 2768.7,1525 R16.2 2770,1525.44 R16.2@2765,1530.44 ; v1(2645,1965) 2645,1920.95 2640,1915.95 2640.95,1915 U1.8 2697.53,1915 2778,1995.47 2778,2083 2880,2185 3170,2185 3310,2045 3310,1814.88 3263.5,1768.39 3263.5,1759.53 3243.98,1740 C9.1
  Bottom Layer w20: v1(1985,1935) v1(1985,2030) 2610,2030 2645,1995 v1(2645,1965) ; v1(2360,1840) 2485,1965 v1(2645,1965) ; J2.1@2600,1460 J2.1 2645,1507.48 v1(2645,1965) ; v2(2745,1525) 2745,970 2790,925 2790,845 2815,820 2985,820 CN1.5@3035,870 ; CN1.5 3103.97,938.97 3973.97,938.97 U6.1
pads on no net: CN1.1 CN1.2 U4.7 U4.31 U4.32 U6.3 U6.5 U6.6 U6.7 U6.8 U6.9
copper on no net: | length 4
  Top Layer w10: 2045,1974 2045,1978

## Silkscreen, mask and mechanical layers (free items; w line width, h text height)
Top Overlay:
  text "T0102" at 1155,2010 h80
  text "sensor v1.0" at 1155,1950 h80
Mechanical 1:
  the board outline again, w10

## Text inside footprints (layer, text, board x,y; h text height)
U4: Bottom Overlay "30" at 1805.29,2750.93 h70; Bottom Overlay "1" at 1183.66,2752.12 h70